# EAGLE board ManitoBoardv.6 (EAGLE 7.2.0)
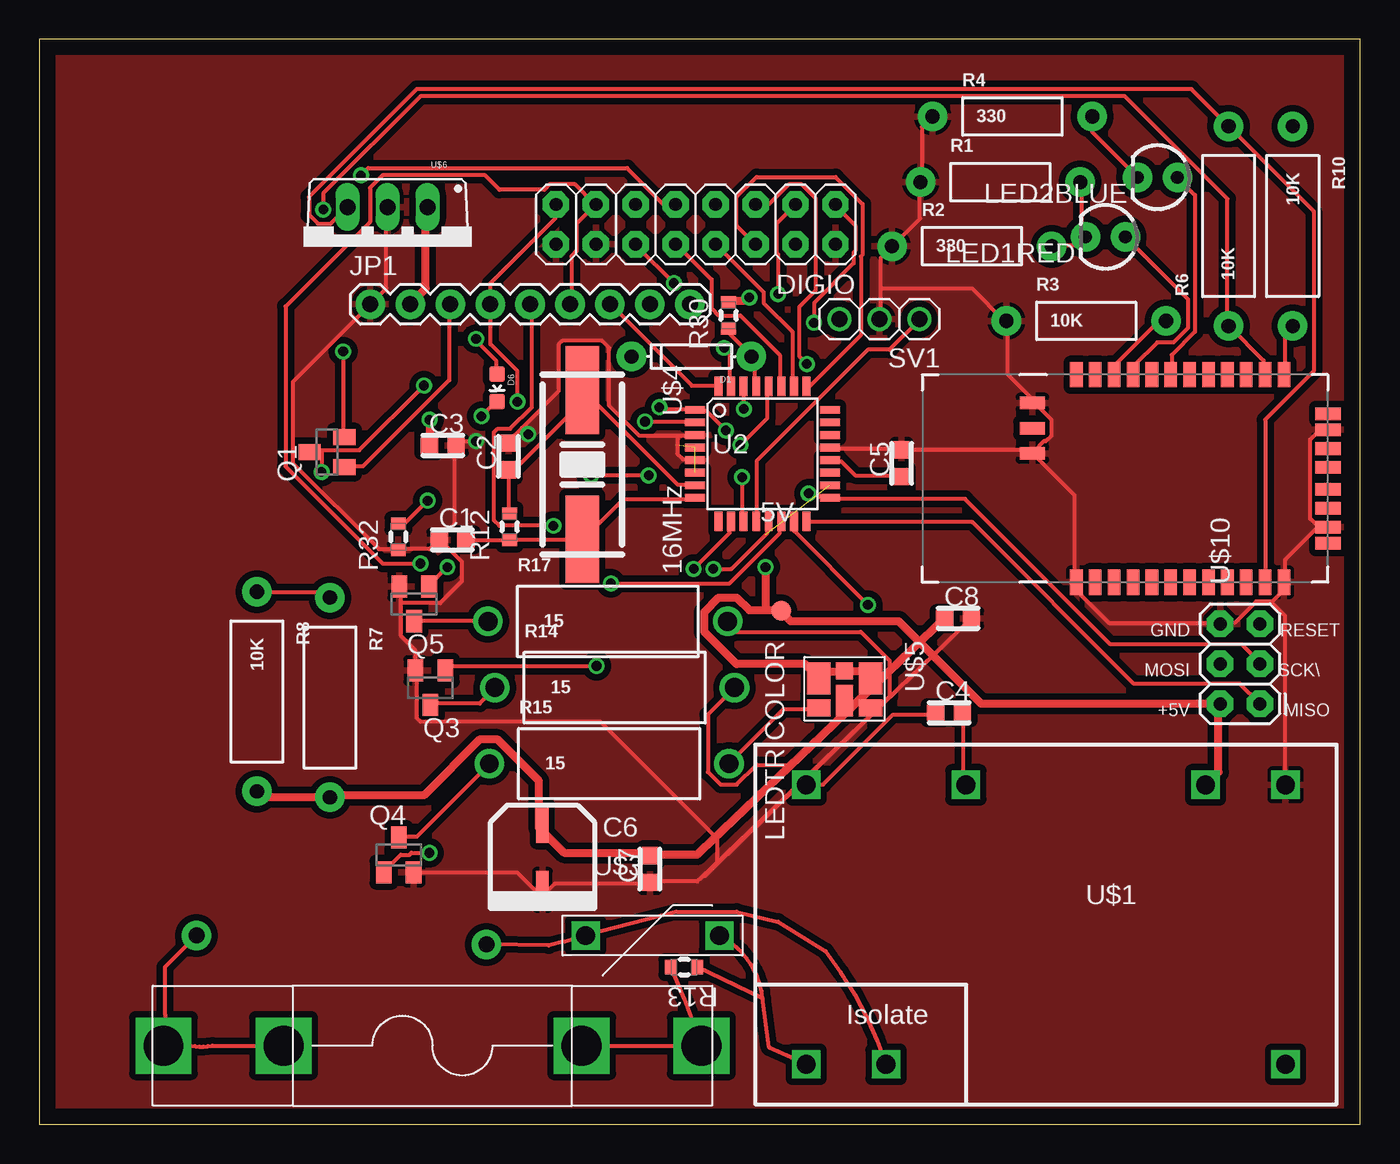
[diagram p0: board, top side]
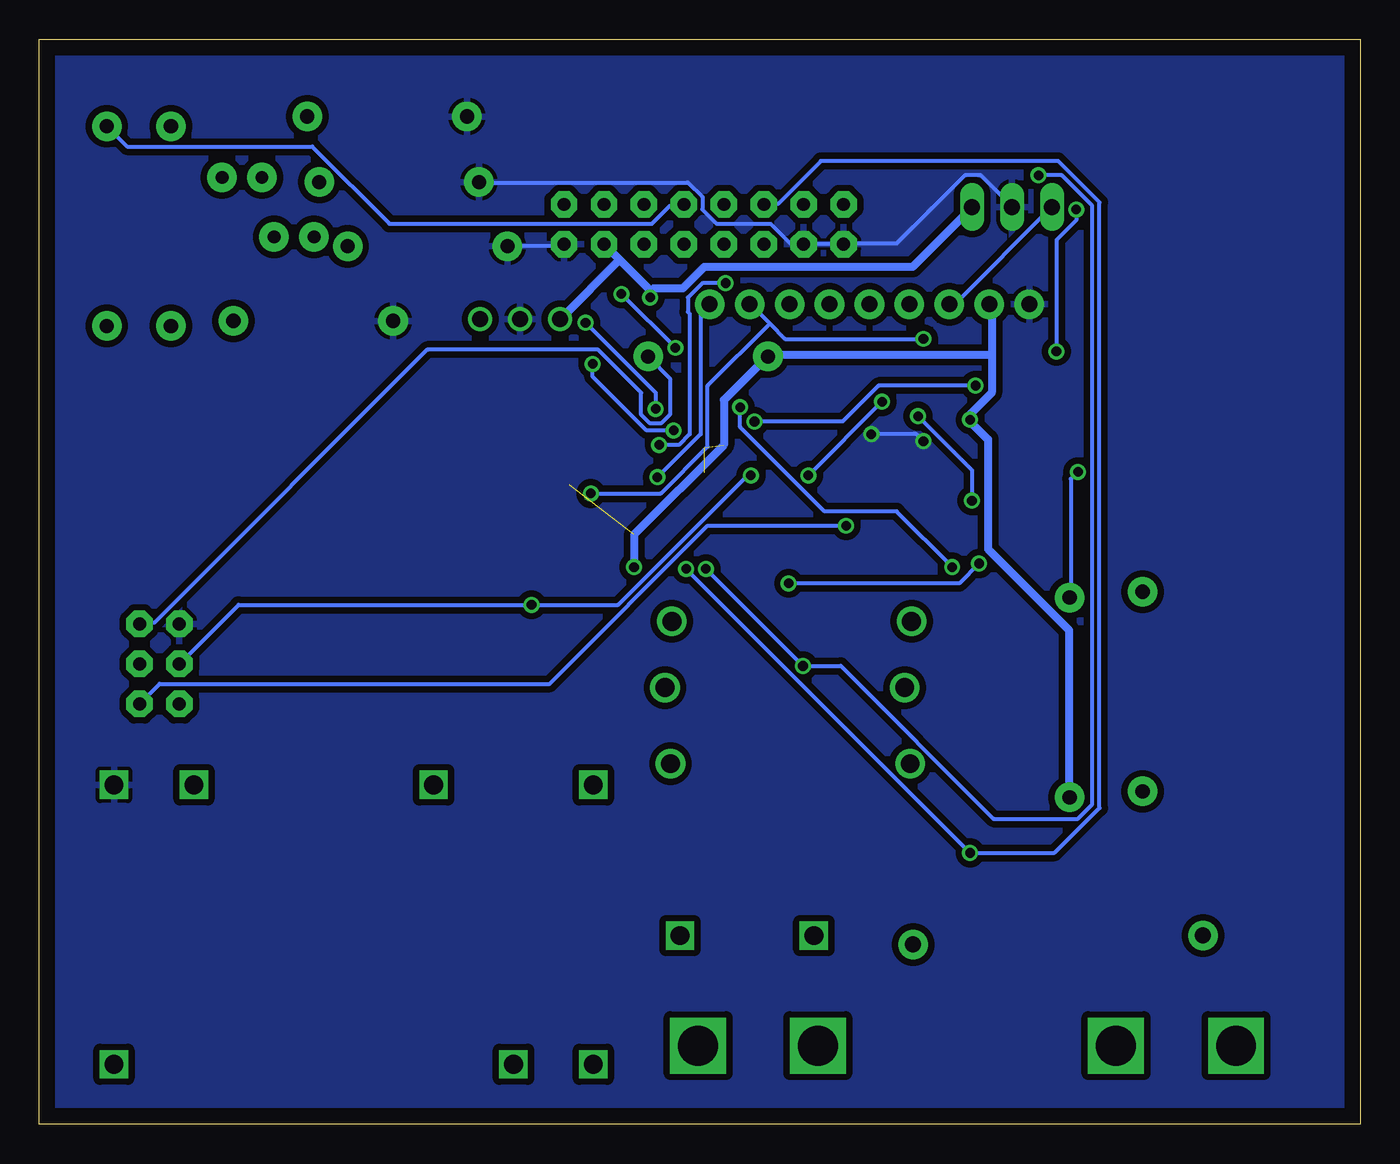
[diagram p1: board, bottom side, seen from below]

Size 84 x 69 mm. Coordinates in mm from the lower left corner, seen from the top.
Outline: 0,0 84,0 84,69 0,69 0,0
Copper layers (1*16): Top 0.035mm / dielectric 1.5mm / Bottom 0.035mm
Design rules "default": minimum track width 10mil, minimum drill 24mil, track to track 8mil, track to pad 8mil, pad to pad 8mil, via to via 8mil, smd to smd 8mil, copper to edge 40mil, drill to drill 8mil, minimum pad ring 10mil, minimum via ring 8mil, stop-mask expansion 4mil, vias tented up to drill 0mil, thermal gap 10mil
Net classes: 2 gnd: width 0.305 mm, drill 0.559 mm, clearance 0.254 mm; 3 usbvcc: width 0.508 mm, drill 0.61 mm, clearance 0.254 mm

## Footprints (pad centres in the part's own frame; a part is rotated, then mirrored left to right if it is on the bottom)
SPRING-CONNECTOR = smd 1.27 x 1.27: P$2 0,0
0603-CAP = smd 1.1 x 1: 1 -0.85,0; 2 0.85,0
WXSERIES-SMDCAP = smd 0.8 x 2.4: NEG 0,-2.1; POS 0,2.1
DIODE-1N4148 = drill 0.9 pad 1.88: A -3.81,0; C 3.81,0
LED-0603 = smd 1 x 1: A 0,-0.877; C 0,0.877
2X8 = drill 0.826 pad 1.676 octagon: 1 0,0; 2 0,2.54; 3 2.54,0; 4 2.54,2.54; 5 5.08,0; 6 5.08,2.54; 7 7.62,0; 8 7.62,2.54; 9 10.16,0; 10 10.16,2.54; 11 12.7,0; 12 12.7,2.54; 13 15.24,0; 14 15.24,2.54; 15 17.78,0; 16 17.78,2.54
1X09 = drill 1.016 pad 1.88: 1 0,0; 2 2.54,0; 3 5.08,0; 4 7.62,0; 5 10.16,0; 6 12.7,0; 7 15.24,0; 8 17.78,0; 9 20.32,0
LED3MM = drill 0.813 pad 1.88: A -1.27,0; K 1.27,0
1X01NS = drill 1.016 pad 1.88: 1 0,0
SOT23 = smd 1 x 1.4: 1 -0.95,-1.1; 2 0.95,-1.1; 3 0,1.1
AXIAL-0.4 = drill 0.9 pad 1.88: P$1 -5.08,0; P$2 5.08,0
AXIAL-0.5 = drill 0.9 pad 1.88: P$1 -6.35,0; P$2 6.35,0
0603RESISTOR = smd 0.762 x 0.94: 1 -0.838,0; 2 0.838,0
AXIAL-0.6 = drill 1.2 pad 1.88: P$1 -7.62,0; P$2 7.62,0
1X03 = drill 1.016: 1 -2.54,0; 2 0,0; 3 2.54,0
RN41 = smd 0.8 x 1.6: 1 -6.6,-6.6; 2 -5.4,-6.6; 3 -4.2,-6.6; 4 -3,-6.6; 5 -1.8,-6.6; 6 -0.6,-6.6; 7 0.6,-6.6; 8 1.8,-6.6; 9 3,-6.6; 10 4.2,-6.6; 11 5.4,-6.6; 12 6.6,-6.6; 13 6.6,6.6; 14 5.4,6.6; 15 4.2,6.6; 16 3,6.6; 17 1.8,6.6; 18 0.6,6.6; 19 -0.6,6.6; 20 -1.8,6.6; 21 -3,6.6; 22 -4.2,6.6; 23 -5.4,6.6; 24 -6.6,6.6 | smd 1.6 x 0.8: 25 -9.4,4.8; 26 -9.4,3.2; 27 -9.4,1.6; 28 9.4,3.1; 29 9.4,-3.1; 30 9.4,-4.122; 31 9.4,-1.9; 32 9.4,-0.7; 33 9.4,0.7; 34 9.4,1.9; 35 9.4,4.122
TQFP32-08 = smd 1.25 x 0.5: 1 -4.293,2.8; 2 -4.293,2; 3 -4.293,1.2; 4 -4.293,0.4; 5 -4.293,-0.4; 6 -4.293,-1.2; 7 -4.293,-2; 8 -4.293,-2.8; 17 4.293,-2.8; 18 4.293,-2; 19 4.293,-1.2; 20 4.293,-0.4; 21 4.293,0.4; 22 4.293,1.2; 23 4.293,2; 24 4.293,2.8 | smd 0.5 x 1.25: 9 -2.8,-4.293; 10 -2,-4.293; 11 -1.2,-4.293; 12 -0.4,-4.293; 13 0.4,-4.293; 14 1.2,-4.293; 15 2,-4.293; 16 2.8,-4.293; 25 2.8,4.293; 26 2,4.293; 27 1.2,4.293; 28 0.4,4.293; 29 -0.4,4.293; 30 -1.2,4.293; 31 -2,4.293; 32 -2.8,4.293
VSK-S3-DCAC = drill 1.2 square: 1 -15.24,-7.62; 3 -10.16,-7.62; 13 15.24,-7.62; 14 15.24,10.16; 16 10.16,10.16; 22 -5.08,10.16; 26 -15.24,10.16
FUSEHOLDER0.25IN = drill 2.54 square: P$1 9.474,0; P$2 17.107,0; P$3 -9.487,0; P$4 -17.107,0
MOV = drill 1.2 square: P$1 -4.255,0; P$2 4.255,0
SMDCRYSTAL = smd 5.588 x 2.108: P$1 -4.75,0; P$2 4.75,0
TRICOLORLED = smd 2.007 x 1.499: A1 -0.152,-1.651; A3 -0.152,1.651 | smd 1.092 x 1.092: A2 -0.635,0 | smd 1.092 x 1.499: C1 1.727,-1.651; C3 1.727,1.651 | smd 2.007 x 1.092: C2 1.27,0
TO220 = drill 1.016 long: COM 0,-2.54; IN -2.54,-2.54; OUT 2.54,-2.54
2X3-ICSP = drill 0.826 pad 1.676 octagon: 1 -2.54,-1.27; 2 -2.54,1.27; 3 0,-1.27; 4 0,1.27; 5 2.54,-1.27; 6 2.54,1.27

## Placement (x,y rotation side)
5V  M01SPRING-CONN  [SPRING-CONNECTOR]  47.18,32.67 0 top
C1  22p  [0603-CAP]  26.28,37.17 0 top
C2  22p  [0603-CAP]  29.83,42.47 90 top
C3  100n  [0603-CAP]  25.66,43.17 0 top
C4  4.7u  [0603-CAP]  57.85,26.17 0 top
C5  100n  [0603-CAP]  54.83,42.04 90 top
C6  100u  [WXSERIES-SMDCAP]  32,17 0 top
C7  100n  [0603-CAP]  38.83,16.23 90 top
C8  100u  [0603-CAP]  58.42,32.17 0 top
D1  [DIODE-1N4148]  41.47,48.83 180 top
D6  [LED-0603]  29.12,46.83 180 top
DIGIO  M08X2  [2X8]  50.63,58.5 180 top
JP1  M09  [1X09]  21.05,52.15 0 top
LED1RED  [LED3MM]  67.8,56.43 180 top
LED2BLUE  [LED3MM]  71.11,60.22 180 top
LINE  M01SMDNS  [1X01NS]  10,12 0 top
NEUTRAL  M01SMDNS  [1X01NS]  28.43,11.43 0 top
Q1  [SOT23]  18.3,42.75 90 top
Q3  [SOT23]  24.87,27.76 180 top
Q4  [SOT23]  22.86,17.13 0 top
Q5  [SOT23]  23.84,33.09 180 top
R1  [AXIAL-0.4]  61.12,59.92 0 top
R2  330  [AXIAL-0.4]  59.31,55.84 0 top
R3  10K  [AXIAL-0.4]  66.58,51.09 0 top
R4  330  [AXIAL-0.4]  61.88,64.09 0 top
R6  10K  [AXIAL-0.5]  75.63,57.12 90 top
R7  [AXIAL-0.5]  18.48,27.14 270 top
R8  10K  [AXIAL-0.5]  13.84,27.52 270 top
R10  10K  [AXIAL-0.5]  79.71,57.12 270 top
R12  1M  [0603RESISTOR]  29.91,37.99 90 top
R13  10  [0603RESISTOR]  41,10 180 top
R14  15  [AXIAL-0.6]  36.59,27.77 0 top
R15  15  [AXIAL-0.6]  36.24,22.93 0 top
R17  15  [AXIAL-0.6]  36.15,31.98 0 top
R30  10k  [0603RESISTOR]  43.83,51.44 90 top
R32  1k  [0603RESISTOR]  22.83,37.36 90 top
SV1  [1X03]  53.42,51.2 180 top
U1  BLUETOOTH-RN41"  [RN41]  72.55,41.07 0 top
U2  ATMEGA328P  [TQFP32-08]  45.99,42.64 0 top
U$1  VSK-S3-5U1  [VSK-S3-DCAC]  64.01,11.43 0 top
U$2  0313.500MXP1  [FUSEHOLDER0.25IN]  25,5 180 top
U$3  MOV1  [MOV]  39,12 0 top
U$4  16MHz  [SMDCRYSTAL]  34.53,41.95 270 top
U$5  LEDTRICOLOR  [TRICOLORLED]  51.21,28.2 270 top
U$6  UA78M33CKCSE3  [TO220]  22.14,55.8 180 top
U$10  6PIN-ICSP  [2X3-ICSP]  76.36,29.28 90 top

## Library data of the parts
5V C1-C8 D1 DIGIO LINE NEUTRAL Q3-Q5 U$1-U$6 U$10 = CharlieCreations
D6 = CharlieCreations; PROD_ID: DIO-09003
JP1 = SparkFun-Connectors
LED1RED LED2BLUE = SparkFun-LED
Q1 SV1 = adafruit
R1-R4 R6-R8 R10 R14 R15 R17 = SparkFun-Passives
R12 R13 R30 R32 = CharlieCreations; MPN: CRCW06031K21FKEA; OC_FARNELL: 1652852; OC_NEWARK: 52K8027; SUPPLIER: Vishay; TOLERANCE: ± 1.0 %; WATTAGE: 0.1W
U1 = SparkFun
U2 = CharlieCreations; PROD_ID: IC-09069

## Nets
+5V [usbvcc]: 5V.P$2 C3.1 C6.POS C7.2 C8.1 D1.C DIGIO.4 JP1.2 R7.P$2 R8.P$2 R30.2 SV1.3 U2.4 U2.6 U2.18 U$1.16 U$5.A1 U$5.A2 U$5.A3 U$6.IN U$10.2
AD0: U2.23
AD1: U2.24
AD2: DIGIO.6 U2.25
AD3: DIGIO.8 U2.26
AD6: U2.19
AD7: U2.22
CTS: U1.16
GND: C1.1 C2.2 C3.2 C5.2 C6.NEG C7.1 C8.2 DIGIO.2 DIGIO.14 DIGIO.16 JP1.1 Q3.2 Q4.2 Q5.2 R1.P$1 R2.P$1 R3.P$1 R4.P$1 R32.1 SV1.2 U1.1 U1.12 U1.25 U1.27 U1.28 U1.29 U2.3 U2.5 U2.21 U$1.14 U$6.COM U$10.6
IO0: DIGIO.1 U2.30
IO1: DIGIO.3 U2.31
IO2/INT: JP1.7 U2.32
IO3: DIGIO.5 Q5.1 U2.1
IO4/TX: Q1.3 R7.P$1 R8.P$1 U2.2
IO5/RX: DIGIO.7 R10.P$1
IO6: DIGIO.9 Q3.1 U2.10
IO7/EN: JP1.9 U2.11
IO8/PIR_SIG: SV1.1 U2.12
IO9: DIGIO.11 Q4.1 U2.13
IO10/SS: DIGIO.13 JP1.6 U2.14
IO11/MOSI: DIGIO.15 JP1.4 U2.15 U$10.4
IO12/MISO: JP1.5 U2.16 U$10.1
IO13/SCK: D6.A JP1.8 U2.17 U$10.3
N$1: C1.2 R12.1 U2.8 U$4.P$2
N$3: LED1RED.K R1.P$2 R2.P$2
N$4: C2.1 R12.2 U2.7 U$4.P$1
N$6: Q5.3 R17.P$1
N$7: Q4.3 R15.P$1
N$8: Q3.3 R14.P$1
N$17: C5.1 U2.20
N$18: D6.C R32.2
N$19: C4.1 U$1.26
N$20: LED2BLUE.K R4.P$2
N$21: C4.2 U$1.22
N$22: R13.1 U$1.1 U$3.P$2
N$23: NEUTRAL.1 U$1.3 U$3.P$1
N$24: LINE.1 U$2.P$1 U$2.P$2
N$25: R13.2 U$2.P$3 U$2.P$4
N$29: R14.P$2 U$5.C2
N$30: R15.P$2 U$5.C1
N$31: R17.P$2 U$5.C3
N$32: LED1RED.A U1.21
N$33: R3.P$2 U1.22
N$34: LED2BLUE.A U1.19
RESET: D1.A R30.1 U2.29 U$10.5
RTS: U1.15
RX: R10.P$2 U1.13
SCL/AD5: DIGIO.12 U2.28
SDA/AD4: DIGIO.10 U2.27
TX: Q1.2 R6.P$1 U1.14
VCC: JP1.3 Q1.1 R6.P$2 U1.11 U$6.OUT

## Tracks (layer width: path | path; a pad name or v marks a point on that pad's centre or on a via)
+5V  (via drill 0.61)  (3 unrouted)
  Top 0.508: U$1.16 74.98,22.4 74.98,26.63 U$10.2 74.75,26.75 59.9,26.75 54.64,32 47.78,32 47.32,32.46 5V.P$2 47.09,32.69 46.18,32.69 | U$5.A3 52.81,28.46 52.47,28.8 51.32,28.8 U$5.A2 50.98,28.8 49.95,28.8 49.72,28.57 U$5.A1 49.49,28.46 48.69,29.26 44.35,29.26 42.29,31.32 42.29,32.58 43.21,33.49 44.35,33.49 45.15,32.69 46.18,32.69 | 13.83,21.26 R8.P$2 13.95,21.14 14.29,20.8 18.4,20.8 R7.P$2 18.63,20.92 24.46,20.92 28.01,24.46 29.15,24.46 31.78,21.83 31.78,18.86 C6.POS 32.01,18.63 33.38,17.26 38.63,17.26 C7.2 38.86,17.14 41.84,17.14 42.06,17.37 C8.1 | v45.15,52.58 44.92,52.35 43.89,52.35 R30.2 | v24.8,44.81 24.8,43.2 C3.1 | U$6.IN 24.58,58.29 24.58,53.15 23.66,52.23 JP1.2 | v46.18,35.43 46.18,32.69
  Bottom 0.508: 45.15,53.03 v45.15,52.58 | 47.09,54.98 48.01,55.89 DIGIO.4 | 47.09,54.98 45.15,53.03 | 47.09,54.98 50.87,51.21 SV1.3 | 23.43,48.92 23.43,52.01 23.55,52.12 JP1.2 | 23.43,48.92 23.43,46.52 24.8,45.15 v24.8,44.81 24.69,44.58 23.66,43.55 23.66,36.58 18.52,31.43 18.52,20.8 R7.P$2 | 23.43,48.92 37.61,48.92 D1.C 37.84,48.69 40.46,46.06 40.46,43.2 46.18,37.49 v46.18,35.43 | 45.15,53.03 44.92,53.15 43.09,53.15 41.72,54.52 28.46,54.52 24.69,58.29 U$6.IN
AD2
  Top 0.254: U2.25 48.81,46.98 49.04,46.98 52.24,50.18 52.24,55.21 52.35,55.32 52.35,58.52 50.64,60.24 45.61,60.24 44.35,58.98 44.35,57.15 45.49,56.01 DIGIO.6
AD3
  Top 0.254: U2.26 47.89,46.98 47.89,50.41 46.06,52.23 46.06,52.92 43.09,55.89 DIGIO.8
GND  (via drill 0.61)
  Top 0.254: Q4.2 23.89,16 30.41,16 31.89,14.52 C6.NEG 32.01,14.52 32.81,15.32 38.75,15.32 C7.1 38.86,15.43 41.84,15.43 42.06,15.66 C8.2 42.29,15.77 43.09,16.57 43.09,18.17 35.66,25.6 24.23,25.6 24,25.83 24,28.8 Q3.2 23.89,28.92 23.89,30.18 22.98,31.09 22.98,33.15 | 30.69,44.29 33.03,46.63 33.03,49.61 33.26,49.84 35.78,49.84 36.23,49.38 36.23,45.72 38.18,43.78 40.58,43.78 | 30.69,44.29 29.83,43.43 C2.2 | 40.58,43.78 41.61,43.78 U2.3 | 40.58,43.78 40.58,42.63 40.92,42.29 41.61,42.29 U2.5 | 22.98,33.15 22.98,34.18 Q5.2 | C1.1 25.38,37.15 24.8,36.58 22.86,36.58 R32.1 22.75,36.58 21.61,36.58 16.12,42.06 16.12,47.21 21.03,52.12 JP1.1 21.15,52.23 22.06,53.15 22.06,58.29 U$6.COM | C1.1 25.49,37.26 26.41,38.18 26.41,43.09 C3.2 26.63,43.2 26.86,43.43 v27.78,43.43 | 22.98,33.15 25.49,33.15 26.86,34.52 26.86,35.78 25.49,37.15 C1.1 | v31.09,43.89 30.69,44.29 | U1.28 81.84,44.12 81.38,44.12 80.81,43.55 80.81,38.52 81.27,38.06 U1.29 81.84,37.95 81.27,37.95 79.21,35.89 79.21,34.52 U1.12 79.1,34.4 79.1,33.95 78.41,33.26 | 78.41,33.26 77.38,33.26 76.01,31.89 75.1,31.89 U$10.6 74.98,31.89 68.01,31.89 65.95,33.95 65.95,34.4 U1.1 65.84,34.52 65.84,40.01 63.21,42.63 U1.27 | U$1.14 79.21,21.6 79.21,32.35 78.41,33.15 78.41,33.26 | R4.P$1 56.7,64.01 56.12,63.44 56.12,60.01 R1.P$1 56.01,59.89 56.01,57.61 54.29,55.89 R2.P$1 54.18,55.78 53.49,55.09 53.49,53.15 | 53.49,53.15 53.49,51.21 SV1.2 | U2.21 50.29,42.98 54.75,42.98 C5.2 54.87,42.86 63.21,42.86 U1.27 | U1.27 63.21,42.75 63.9,43.43 64.01,43.43 64.35,43.78 64.35,44.81 63.21,45.95 U1.25 63.21,46.06 61.61,47.66 61.61,50.98 R3.P$1 61.38,51.09 59.32,53.15 53.49,53.15
  Bottom 0.254: U$6.COM 22.18,58.41 24.12,60.35 25.15,60.35 29.49,56.01 32.81,56.01 DIGIO.16 32.92,56.01 35.32,56.01 DIGIO.14 35.44,56.01 36.23,56.01 37.49,57.26 40.92,57.26 41.84,58.18 41.84,58.98 42.75,59.89 56.01,59.89 R1.P$1 | v31.09,43.89 28.23,43.89 v27.78,43.43 | DIGIO.2 50.64,55.89 54.18,55.89 R2.P$1
  pour Top (isolate 0.406): 0,69 84,69 84,0 0,0
  pour Bottom (isolate 0.406): 0,69 84,69 84,0 0,0
IO0  (via drill 0.61)
  Top 0.254: v44.81,45.49 44.81,46.86 U2.30 | v49.27,50.98 49.27,52.23 51.78,54.75 51.78,55.44 51.89,55.55 51.89,57.15 50.64,58.41 DIGIO.1
  Bottom 0.254: v44.81,45.49 44.81,46.52 v49.27,50.98
IO1  (via drill 0.61)
  Top 0.254: v43.55,49.38 43.89,49.03 43.89,46.98 U2.31 | v46.98,52.81 46.98,55.32 46.87,55.44 46.87,57.26 48.01,58.41 DIGIO.3
  Bottom 0.254: v46.98,52.81 v43.55,49.38
IO2/INT
  Top 0.254: U2.32 43.09,46.98 41.49,46.98 36.35,52.12 JP1.7
IO3  (via drill 0.61)
  Top 0.254: v39.44,45.61 39.55,45.49 41.61,45.49 U2.1 41.72,45.38 42.41,45.38 v43.66,44.12 | v25.95,35.43 24.8,34.29 Q5.1 | v48.81,48.35 48.35,48.81 48.35,52.01 49.38,53.03 49.38,58.86 48.47,59.78 47.66,59.78 46.41,58.52 45.61,58.52 DIGIO.5
  Bottom 0.254: v39.44,45.61 39.44,44.35 34.06,38.98 29.49,38.98 v25.95,35.43 | v48.81,48.35 48.81,47.55 45.38,44.12 v43.66,44.12
IO4/TX  (via drill 0.61)
  Top 0.254: R8.P$1 13.95,33.83 18.18,33.83 18.4,33.6 R7.P$1 | v38.52,44.69 41.61,44.69 U2.2 | v24.46,46.98 20.35,42.86 17.95,42.86 | 17.95,42.86 17.26,42.86 Q1.3 | 17.95,42.86 v17.95,41.49
  Bottom 0.254: v38.52,44.69 32.92,44.69 30.63,46.98 v24.46,46.98 | v17.95,41.49 18.4,41.03 18.4,33.6 R7.P$1
IO5/RX
  Bottom 0.254: DIGIO.7 43.09,58.41 43.89,58.41 45.04,57.26 61.72,57.26 66.64,62.18 78.41,62.18 79.67,63.44 R10.P$1
IO6  (via drill 0.61)
  Top 0.254: v41.61,35.32 43.89,37.6 43.89,38.29 U2.10 | v35.44,29.15 26.06,29.15 25.83,28.92 Q3.1 | v20.46,60.35 20.92,60.81 37.38,60.81 39.66,58.52 40.46,58.52 DIGIO.9
  Bottom 0.254: v41.61,35.32 v35.44,29.15 33.03,29.15 23.32,19.43 17.95,19.43 17.03,20.34 17.03,58.41 18.98,60.35 v20.46,60.35
IO7/EN  (via drill 0.61)
  Top 0.254: v44.69,41.15 44.69,38.41 U2.11
  Bottom 0.254: v44.69,41.15 41.95,43.89 41.95,51.55 41.38,52.12 JP1.9
IO8/PIR_SIG
  Top 0.254: U2.12 45.61,38.41 45.61,42.18 52.69,49.26 54.07,49.26 55.9,51.09 SV1.1
IO9  (via drill 0.61)
  Top 0.254: v42.86,35.32 44.01,35.32 46.29,37.6 46.29,38.29 U2.13 | v24.8,17.26 23.66,17.26 23.55,17.14 22.98,17.14 21.95,16.12 Q4.1
  Bottom 0.254: v42.86,35.32 v24.8,17.26 19.43,17.26 16.58,20.12 16.58,58.64 19.2,61.27 34.29,61.27 37.03,58.52 37.84,58.52 DIGIO.11
IO10/SS  (via drill 0.61)
  Top 0.254: v36.35,34.4 43.89,34.4 47.09,37.6 47.09,38.29 U2.14 | v24.23,35.66 21.83,35.66 15.66,41.83 15.66,52.01 21.03,57.38 21.03,59.55 21.83,60.35 28.35,60.35 29.26,59.44 32.12,59.44 32.46,59.78 34.06,59.78 35.32,58.52 DIGIO.13 35.32,58.41 34.18,57.26 34.18,55.55 33.84,55.21 33.84,52.23 JP1.6
  Bottom 0.254: v36.35,34.4 25.49,34.4 v24.23,35.66
IO11/MOSI  (via drill 0.61)
  Top 0.254: DIGIO.15 32.81,58.41 32.81,57.61 28.69,53.49 28.69,52.23 JP1.4 28.69,52.12 28.69,49.61 30.41,47.89 v30.41,45.95 | v52.69,33.03 48.01,37.72 48.01,38.29 U2.15 | v38.75,41.26 v35.09,41.26
  Bottom 0.254: U$10.4 74.98,29.38 71.33,33.03 v52.69,33.03 47.21,33.03 38.98,41.26 v38.75,41.26 | v35.09,41.26 v30.41,45.95
IO12/MISO  (via drill 0.61)
  Top 0.254: U2.16 48.81,38.29 59.32,38.29 69.61,28 76.35,28 77.61,26.75 U$10.1 | v32.69,38.06 29.26,38.06 28.92,38.41 28.92,44.01 29.15,44.23 29.95,44.23 31.32,45.61 31.32,52.12 JP1.5
  Bottom 0.254: v32.69,38.06 41.49,38.06 51.55,28 76.35,28 77.61,26.75 U$10.1
IO13/SCK  (via drill 0.61)
  Top 0.254: v27.78,49.95 27.78,49.84 29.03,48.58 29.03,47.78 D6.A | U$10.3 77.61,29.38 76.47,30.52 68.12,30.52 58.87,39.78 50.29,39.78 U2.17 50.18,39.89 49.61,39.89 49.38,40.12 v48.92,40.12
  Bottom 0.254: v27.78,49.95 36.58,49.95 37.55,50.92 | 37.55,50.92 38.75,52.12 JP1.8 | 37.55,50.92 41.49,46.98 41.49,43.09 44.47,40.12 v48.92,40.12
N$1
  Top 0.254: C1.2 27.2,37.15 29.83,37.15 R12.1 29.95,37.15 34.52,37.15 U$4.P$2 34.63,37.26 37.15,39.78 41.61,39.78 U2.8
N$3
  Top 0.254: R2.P$2 64.47,55.89 66.07,55.89 66.53,56.35 LED1RED.K 66.41,56.46 66.3,56.58 66.3,59.89 R1.P$2
N$4
  Top 0.254: R12.2 29.83,38.86 29.83,41.6 C2.1 29.95,41.6 30.18,41.6 34.86,46.29 U$4.P$1 34.63,46.63 40.58,40.69 41.61,40.69 U2.7
N$6
  Top 0.254: Q5.3 23.89,32 28.46,32 R17.P$1
N$7
  Top 0.254: Q4.3 22.86,18.29 24,18.29 28.58,22.86 R15.P$1
N$8
  Top 0.254: Q3.3 24.92,26.75 28.01,26.75 28.92,27.66 R14.P$1
N$17
  Top 0.254: C5.1 54.75,41.26 51.89,41.26 50.98,42.18 50.29,42.18 U2.20
N$18  (via drill 0.61)
  Top 0.254: v24.69,39.66 23.32,38.29 22.86,38.29 R32.2 | v28.12,45.03 29.03,45.95 D6.C
  Bottom 0.254: v24.69,39.66 24.69,41.6 v28.12,45.03
N$19
  Top 0.254: C4.1 56.92,26.06 54.29,26.06 49.84,21.6 48.81,21.6 U$1.26
N$20
  Top 0.254: R4.P$2 66.98,64.01 66.98,63.09 69.84,60.24 LED2BLUE.K
N$21
  Top 0.254: C4.2 58.75,26.06 58.75,21.72 58.87,21.6 U$1.22
N$22
  Top 0.254: 46,8 46.41,4.89 48.69,3.89 U$1.1 | 46,8 R13.1 | 46,8 arc57 U$3.P$2
N$23
  Top 0.254: U$1.3 arc19 50,11 46.98,12.89 44.35,13.52 40.52,13.52 U$3.P$1 33.41,11.63 32.41,11.37 NEUTRAL.1
N$24
  Top 0.254: LINE.1 8,10 8,7 U$2.P$2 9.62,4.99 arc20 11,5 U$2.P$1
N$25
  Top 0.254: R13.2 41,8 U$2.P$4 U$2.P$3
N$29
  Top 0.254: U$5.C2 51.21,26.86 51.21,26.29 47.78,22.86 45.61,22.86 44.35,21.6 43.32,21.6 42.52,22.4 42.52,26.06 44.12,27.66 R14.P$2
N$30
  Top 0.254: U$5.C1 49.49,26.4 47.32,26.4 43.89,22.97 R15.P$2
N$31
  Top 0.254: U$5.C3 52.92,26.52 53.38,26.52 54.07,27.2 54.07,29.49 52.24,31.32 44.35,31.32 43.78,31.89 R17.P$2
N$32
  Top 0.254: U1.21 69.61,47.78 69.61,48.23 71.1,49.72 72.12,49.72 73.04,50.63 73.04,52.46 69.15,56.35 LED1RED.A
N$33
  Top 0.254: U1.22 68.35,47.78 68.35,48.23 71.1,50.98 71.55,50.98 R3.P$2
N$34
  Top 0.254: U1.19 72.01,47.78 72.01,48.92 73.5,50.41 73.5,59.09 72.47,60.12 LED2BLUE.A
RESET
  Top 0.254: R30.1 43.89,50.52 43.89,50.29 45.27,48.92 D1.A 45.38,48.81 45.49,48.69 45.49,46.98 U2.29
  Bottom 0.254: U$10.5 77.61,31.89 76.7,31.89 59.32,49.26 48.47,49.26 45.72,46.52 45.72,45.15 45.15,44.58 44.47,44.58 43.89,45.15 43.89,47.43 45.27,48.81 D1.A
RX
  Top 0.254: U1.13 79.21,47.78 79.21,50.29 79.67,50.75 R10.P$2
SCL/AD5  (via drill 0.61)
  Top 0.254: v44.58,43.2 46.29,44.92 46.29,46.86 U2.28 | v40.35,53.49 37.95,55.89 DIGIO.12
  Bottom 0.254: v44.58,43.2 43.32,43.2 42.64,43.89 42.64,51.55 42.75,51.66 42.75,52.58 41.84,53.49 v40.35,53.49
SDA/AD4
  Top 0.254: U2.27 47.09,46.98 47.09,48.92 44.58,51.44 43.21,51.44 42.75,51.89 42.75,53.72 40.58,55.89 DIGIO.10
TX  (via drill 0.61)
  Top 0.254: v19.32,49.15 19.32,43.78 Q1.2 | v18.06,58.18 18.06,59.21 24.23,65.38 69.04,65.38 75.55,58.86 75.55,50.86 R6.P$1 75.67,50.75 77.84,48.58 77.84,47.78 U1.14
  Bottom 0.254: v19.32,49.15 19.32,56.24 18.06,57.49 v18.06,58.18
VCC
  Top 0.254: Q1.1 19.43,41.83 20.58,41.83 26.06,47.32 26.06,52.12 JP1.3 | U1.11 77.95,34.52 77.95,44.81 81.04,47.89 81.04,58.06 75.67,63.44 R6.P$2 75.55,63.55 73.27,65.84 24,65.84 17.15,58.98 17.15,57.84 17.72,57.26 18.52,57.26 19.55,58.29 U$6.OUT
  Bottom 0.254: U$6.OUT 19.66,58.29 25.72,52.23 26.06,52.23 JP1.3